# EAGLE board xmas_board (EAGLE 8.4.3)

Size 160 x 100 mm. Coordinates in mm from the lower left corner, seen from the top.
Outline: 160,100 80,100
Outline: 80,100 0,100
Outline: 80,100 50,60 60,60 40,40 50,40 30,20 70,20 70,0 90,0 90,20 130,20 110,40 120,40 100,60 110,60 80,100
Copper layers (1*16): Top 0.035mm / dielectric 1.5mm / Bottom 0.035mm
Design rules "default": minimum track width 6mil, minimum drill 0.35mm, track to track 6mil, track to pad 6mil, pad to pad 6mil, via to via 6mil, smd to smd 6mil, copper to edge 40mil, drill to drill 6mil, minimum pad ring 10mil, minimum via ring 8mil, stop-mask expansion 4mil, vias tented up to drill 0mil, thermal gap 10mil

## Footprints (pad centres in the part's own frame; a part is rotated, then mirrored left to right if it is on the bottom)
BATTCOM_20MM_PTH = drill 1.3: 1 11.85,0; 2 -8.15,0
LED_5MM-KIT = drill 0.813 pad 1.88: A -1.27,0; K 1.27,0
BUZZER-12MM-KIT = drill 0.9 pad 1.88: + 3.25,0; - -3.25,0
AXIAL-0.3-KIT = drill 1.016 pad 2.032: P$1 -3.81,0; P$2 3.81,0
TACTILE_SWITCH_PTH_6.0MM_KIT = drill 1.016 pad 1.88: 1 -3.251,2.261; 2 3.251,2.261; 3 -3.251,-2.261; 4 3.251,-2.261
DIP08_MCU = drill 0.813 pad 1.626: 1 -3.81,-3.81; 2 -1.27,-3.81; 3 1.27,-3.81; 4 3.81,-3.81; 5 3.81,3.81; 6 1.27,3.81; 7 -1.27,3.81; 8 -3.81,3.81

## Placement (x,y rotation side)
BT1  [BATTCOM_20MM_PTH]  -20,60 0 top  (outside the outline)
D1  [LED_5MM-KIT]  10,10 0 top
LS1  BUZZER-PTH_KIT  [BUZZER-12MM-KIT]  -20,10 0 top  (outside the outline)
R1  4K7  [AXIAL-0.3-KIT]  20,60 0 top
R2  22R  [AXIAL-0.3-KIT]  -20,30 0 top  (outside the outline)
R3  220R  [AXIAL-0.3-KIT]  10,30 0 top
S1  MOMENTARY-SWITCH-SPST-PTH-6.0MM-KIT  [TACTILE_SWITCH_PTH_6.0MM_KIT]  10,90 0 top
U1  TINY85-20-DIP  [DIP08_MCU]  -20,90 0 top  (outside the outline)

## Library data of the parts
BT1 = SparkFun-Batteries; PROD_ID: BATT-09031; SF_SKU: PRT-00783
D1 = SparkFun-LED
LS1 = SparkFun-Electromechanical; PROD_ID: COMP-08253; SF_SKU: COM-07950
R1-R3 = SparkFun-Resistors
S1 = SparkFun-Switches; PROD_ID: SWCH-08441; SF_SKU: COM-00097
U1 = SparkFun-Retired; PROD_ID: IC-09445

## Nets
GND: D1.K LS1.- S1.3
N$1: R1.P$2 S1.1 U1.1
N$2: R2.P$2 U1.5
N$3: LS1.+ R2.P$1
N$4: BT1.1 U1.8
N$5: BT1.2 U1.4
N$6: D1.A R3.P$1
N$7: R3.P$2 U1.2
VCC: R1.P$1

## Tracks (layer width: path | path; a pad name or v marks a point on that pad's centre or on a via)
GND  (2 unrouted)
N$1  (2 unrouted)
N$2  (1 unrouted)
N$3  (1 unrouted)
N$4  (1 unrouted)
N$5  (1 unrouted)
N$6  (1 unrouted)
N$7  (1 unrouted)